# Altium PCB BIO26_pishield.PcbDoc (part 1 of 2)
Units mm, origin at the board's own origin, x right, y up, seen from the top; angles counter-clockwise.
Board outline 69 x 56 mm, 4 copper layers (Top Layer, Int1 (GND), Int2 (PWR), Bottom Layer), stack 1.369 mm thick; 29 components, 69 nets, 266 pads, 109 vias.
Unrouted connection lines stored in the file: 49.
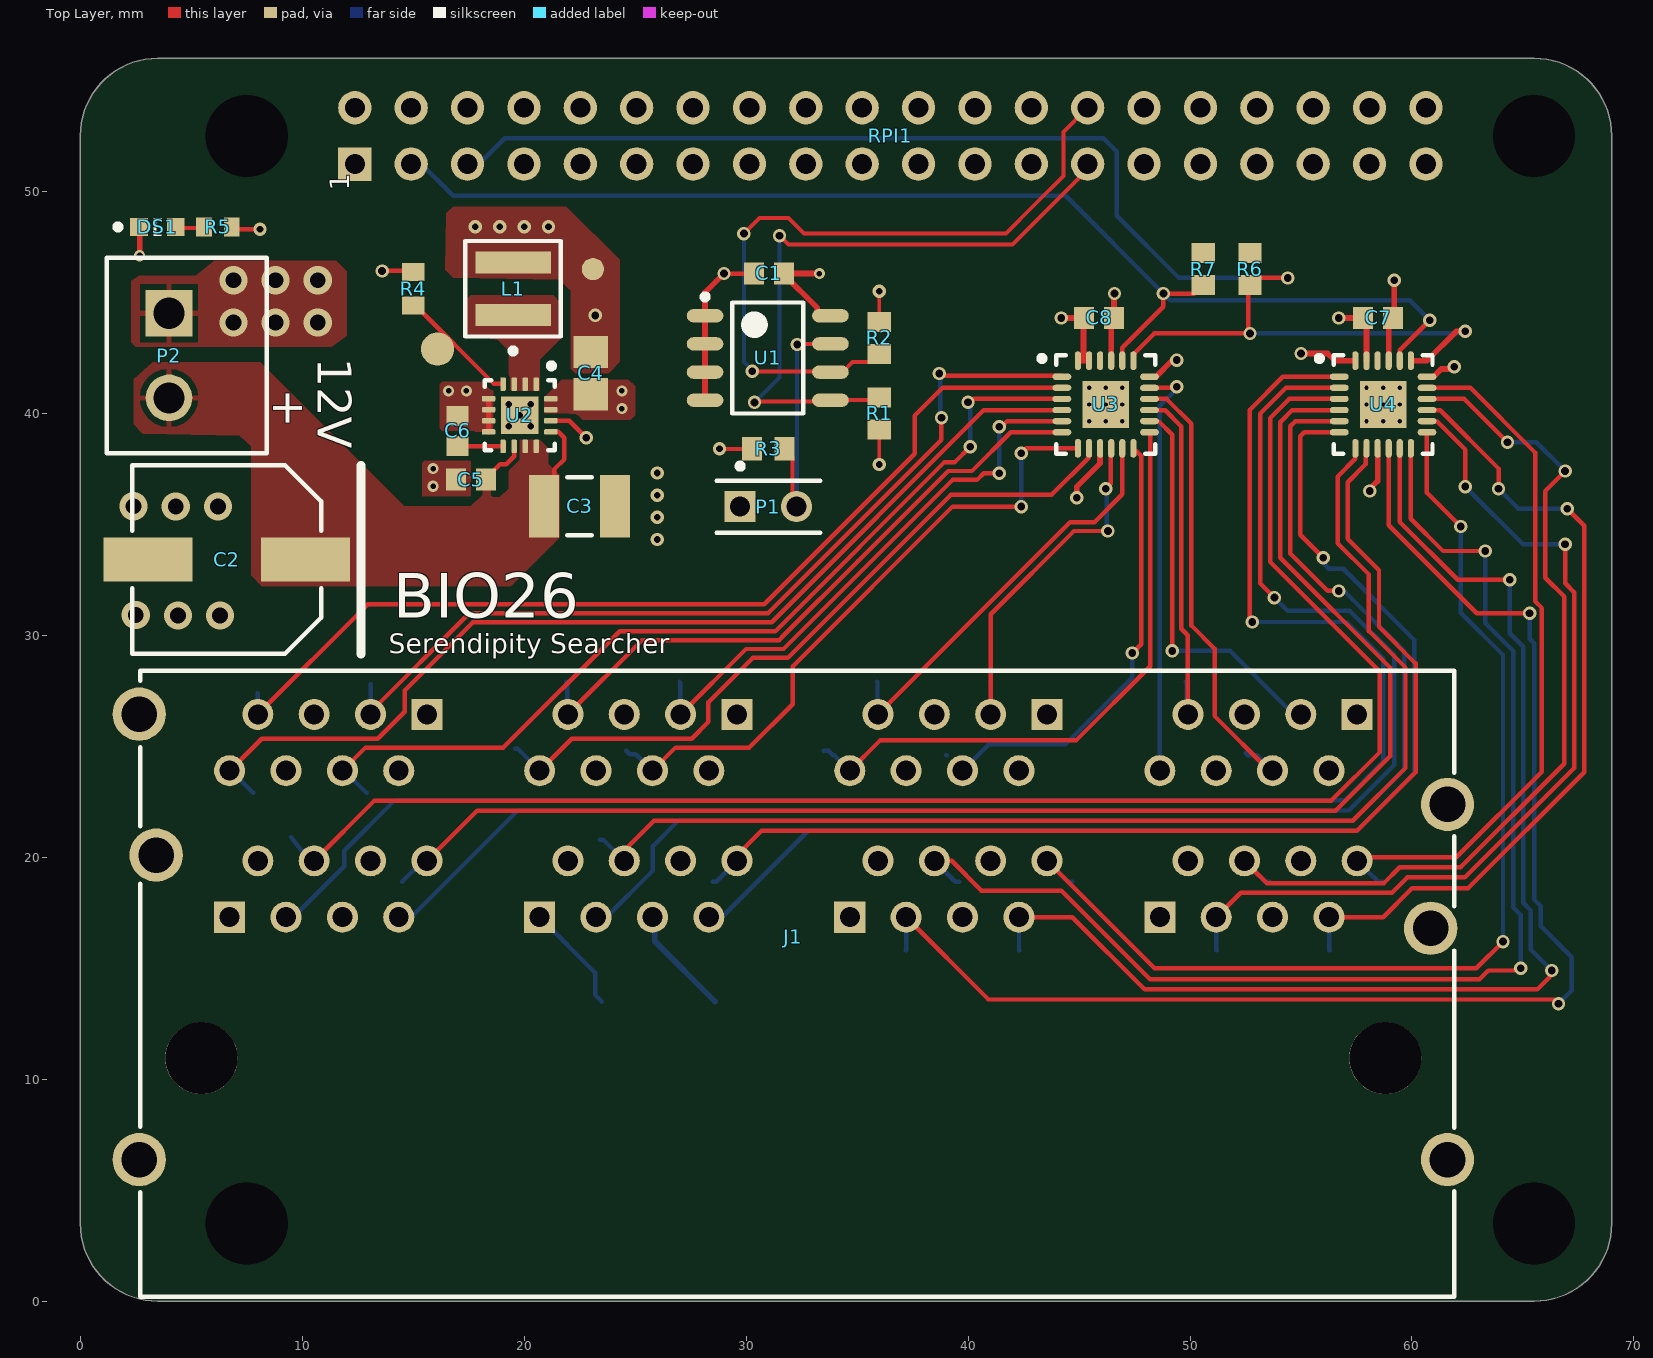
[diagram p0: Top Layer view]
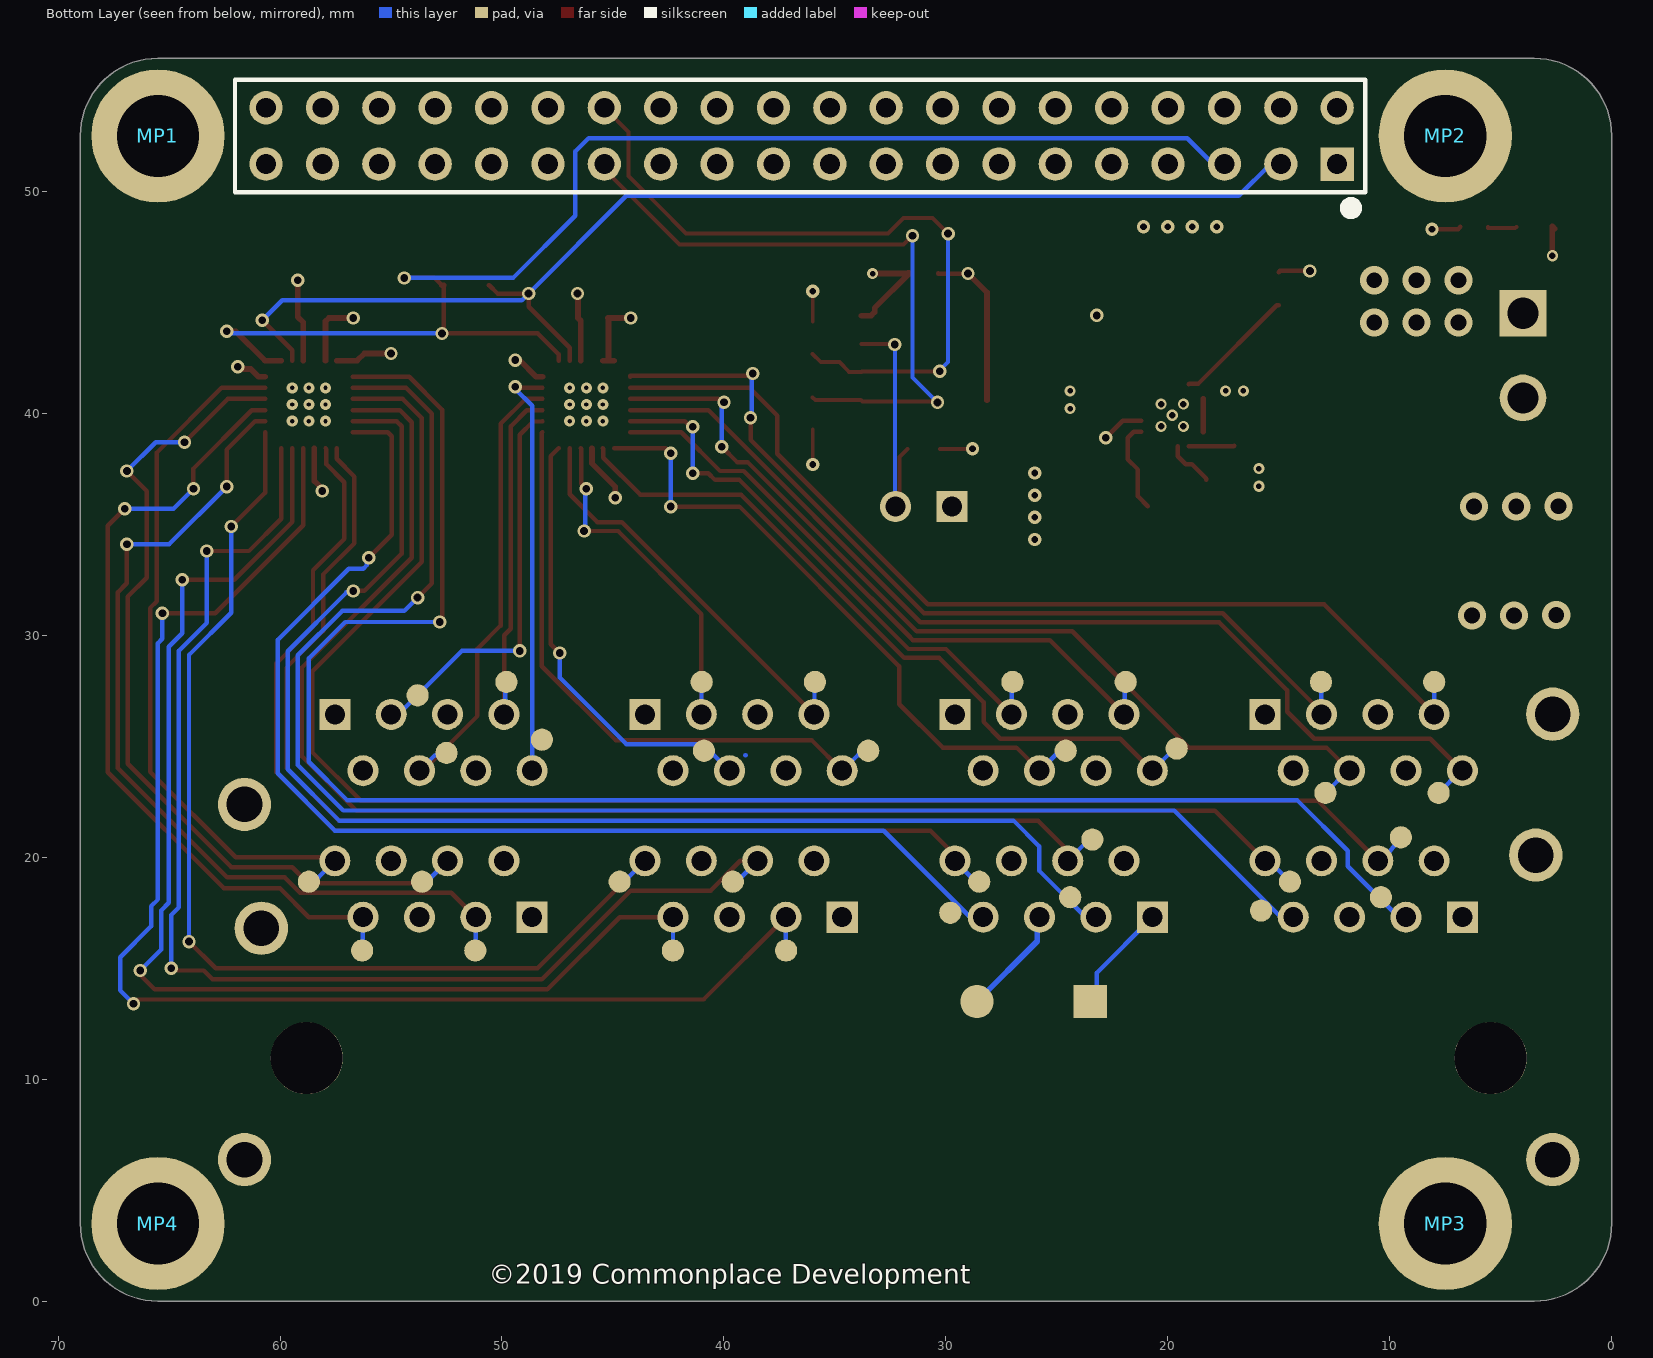
[diagram p1: Bottom Layer view, seen from below]
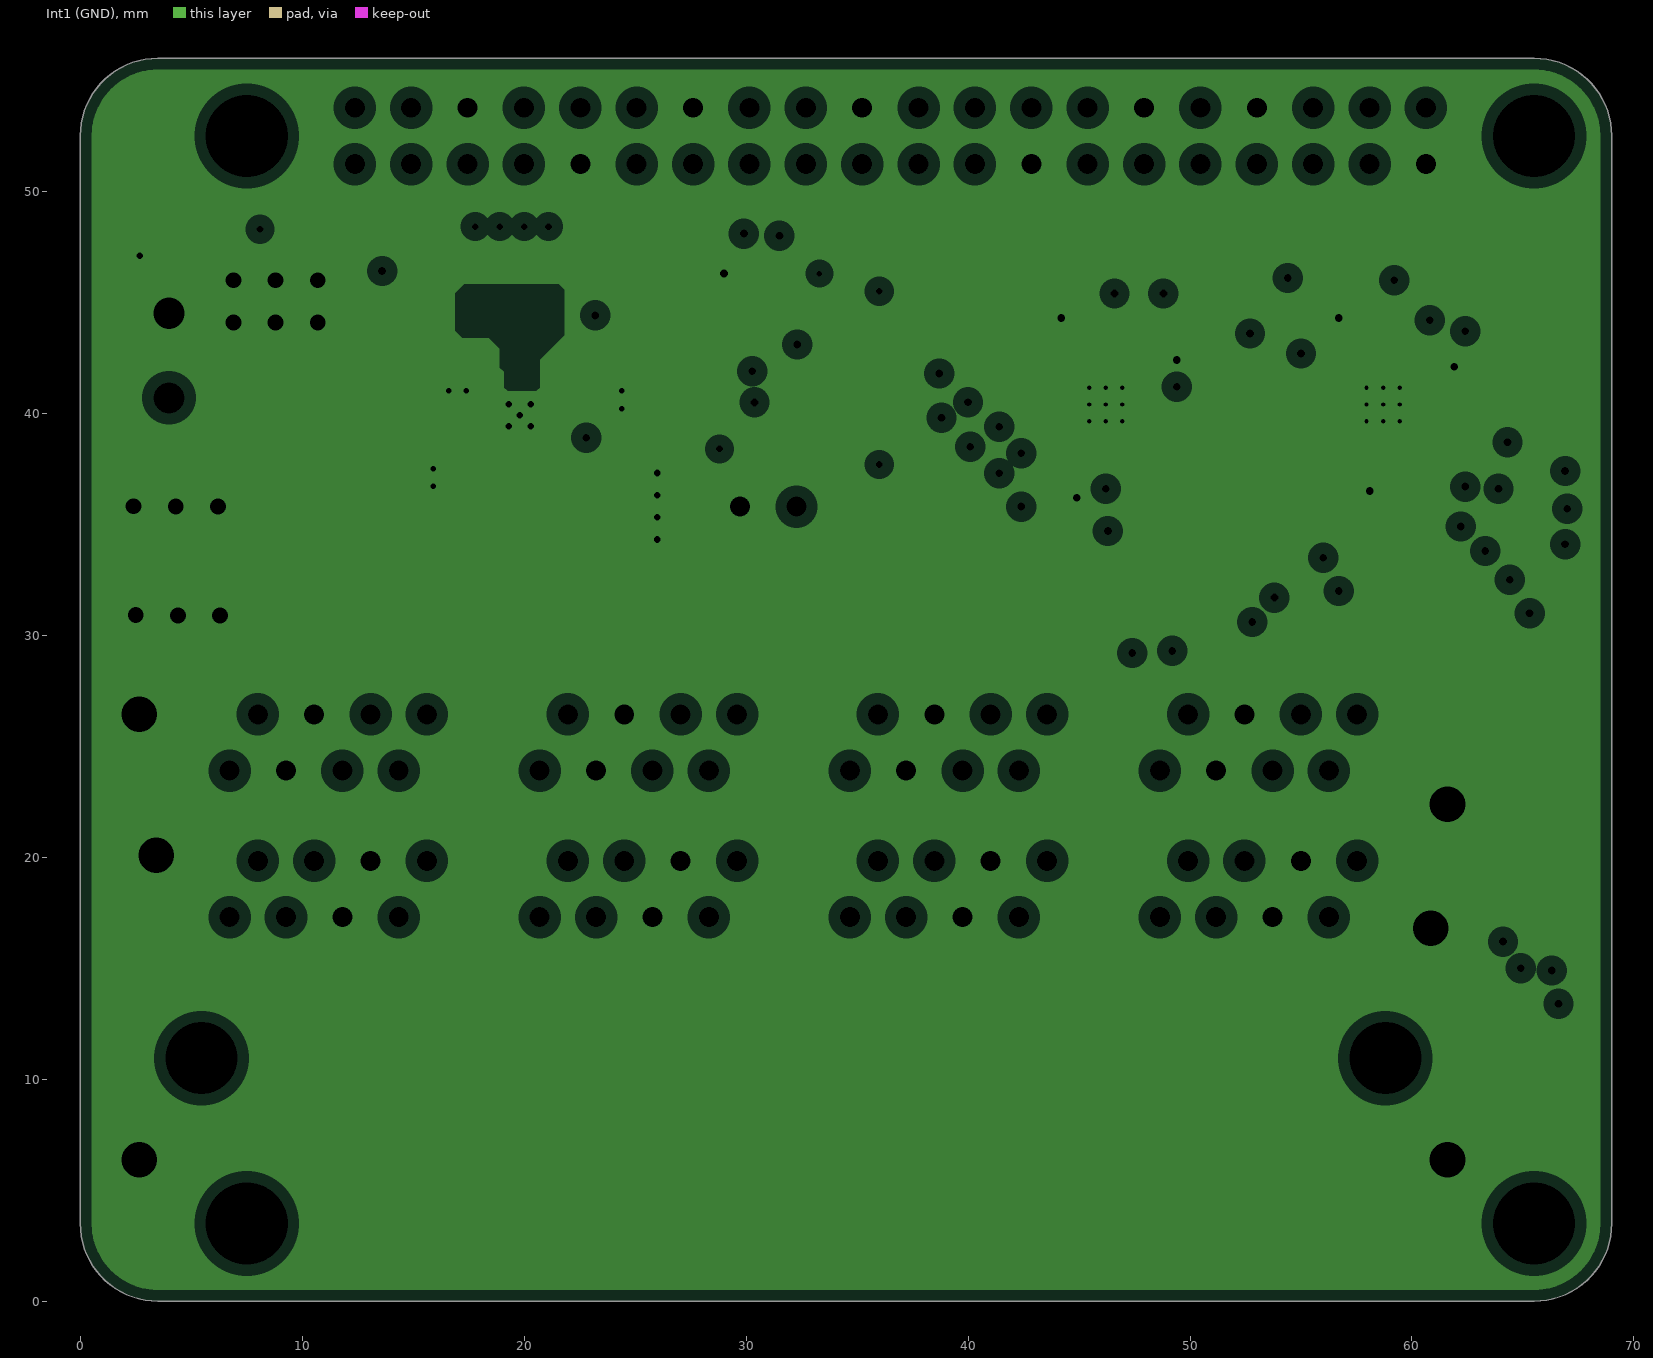
[diagram p2: Int1 (GND), clearances drawn from the general rule]
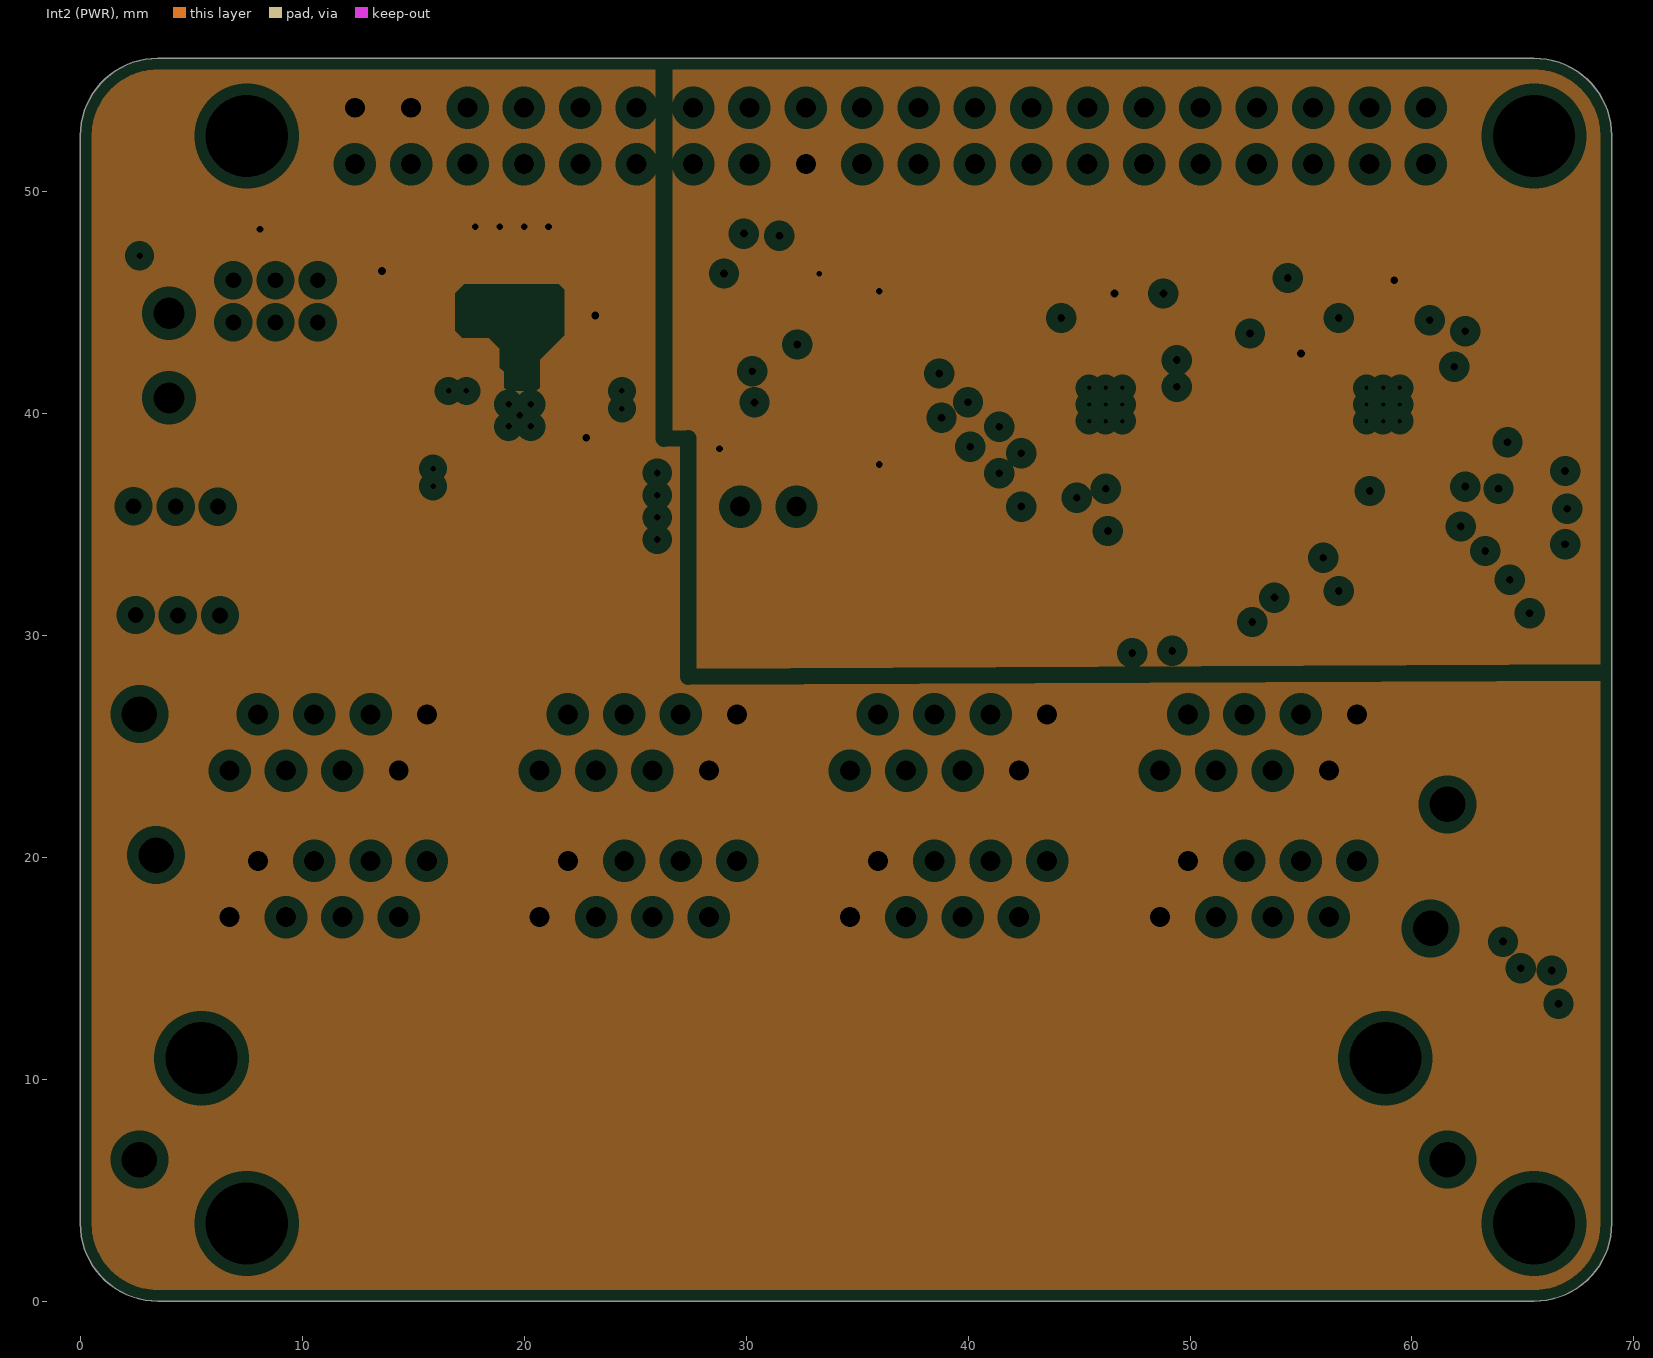
[diagram p3: Int2 (PWR), clearances drawn from the general rule]

## Layer stack, top to bottom
Top Solder: solder mask 0.0254, SM-001, Dk 4
Top Layer: signal copper 0.035
Dielectric 1: prepreg 0.1295, PP-017, Dk 4.3
Dielectric 2: prepreg 0.1295, PP-017, Dk 4.3
Int1 (GND): plane copper 0.035, net GND
Dielectric 3: core 0.7112, Core-039, Dk 4.8
Int2 (PWR): plane copper 0.035, net (Multiple Nets)
Dielectric 4: prepreg 0.1295, PP-017, Dk 4.3
Dielectric 5: prepreg 0.1295, PP-017, Dk 4.3
Bottom Layer: signal copper 0.035
Bottom Solder: solder mask 0.0254, SM-001, Dk 4

## Board outline
3.5,0 65.5,0 ccw(c65.5,3.5) 69,3.5 69,52.5 ccw(c65.5,52.5) 65.5,56 3.5,56 ccw(c3.5,52.5) 0,52.5 0,3.5 ccw(c3.5,3.5)

## Design rules (kind name [scope] priority, off if disabled: settings)
BoardOutlineClearance [All] p1: gap=0.2 ignorepadtopadclearanceinfootprint=FALSE except(0.4: Arc-SplitBarrior Arc-SplitContinuation Track-SplitBarrior Track-SplitContinuation SMDPad-SplitBarrior SMDPad-SplitContinuation THPad-SplitBarrior THPad-SplitContinuation Via-SplitBarrior Via-SplitContinuation Fill-SplitBarrior Fill-SplitContinuation Poly-SplitBarrior Poly-SplitContinuation Region-SplitBarrior Region-SplitContinuation Text-SplitBarrior Text-SplitContinuation)
Clearance Clearance_IO [InNetClass('GPIO[1..16]') or InNetClass('HALL[1..16]')] p1: gap=0.2 ignorepadtopadclearanceinfootprint=FALSE except(0.089: SMDPad-SMDPad; 0.127: Arc-Via Track-Via SMDPad-Via THPad-Via Via-Via; 0.254: Arc-Text Track-Text SMDPad-Text THPad-Text Via-Text Fill-Text Poly-Text Region-Text Text-Text)
Clearance [All] p2: gap=0.2 ignorepadtopadclearanceinfootprint=FALSE except(0.089: Arc-Arc Arc-Track Arc-SMDPad Track-Track Track-SMDPad SMDPad-SMDPad; 0.127: Arc-Via Track-Via SMDPad-Via THPad-Via Via-Via; 0.254: Arc-Text Track-Text SMDPad-Text THPad-Text Via-Text Fill-Text Poly-Text Region-Text Text-Text)
Clearance "Clearance Bottom Layer" [OnLayer('Bottom Layer')] p3: gap=0.203 ignorepadtopadclearanceinfootprint=TRUE except(0.254: Arc-Text Track-Text SMDPad-Text THPad-Text Via-Text Fill-Text Poly-Text Region-Text Text-Text)
Clearance "Clearance Top Layer" [OnLayer('Top Layer')] p4: gap=0.203 ignorepadtopadclearanceinfootprint=TRUE except(0.254: Arc-Text Track-Text SMDPad-Text THPad-Text Via-Text Fill-Text Poly-Text Region-Text Text-Text)
DiffPairsRouting RS485 [InDifferentialPair('RS485')] p1: maxlimit=0.127 minlimit=0.127 mostfreqgap=0.127 substack1={38668E16-BA02-485C-B457-04E51ADFF381} toplayer_minwidth=0.157 toplayer_maxwidth=0.157 toplayer_prefwidth=0.157 bottomlayer_minwidth=0.157 bottomlayer_maxwidth=0.157 bottomlayer_prefwidth=0.157 impedanceprofiledriven=TRUE impedanceprofileid={2957A7B5-88C2-4469-BF19-BCCFE4860604} impedanceprofilevalue=100.000000 maxuncoupledlength=12.7
DiffPairsRouting [All] p2: maxlimit=0.254 minlimit=0.254 mostfreqgap=0.254 toplayer_minwidth=0.381 toplayer_maxwidth=0.381 toplayer_prefwidth=0.381 bottomlayer_minwidth=0.381 bottomlayer_maxwidth=0.381 bottomlayer_prefwidth=0.381 maxuncoupledlength=12.7
Height [All] p1: minheight=0 maxheight=100 prefheight=12.7
HoleSize [All] p1: absolutevalues=TRUE maxlimit=6.3 minlimit=0.2 maxpercent=80.000 minpercent=20.000
MinimumAnnularRing [All] p1: minimumring=0.076
MinimumSolderMaskSliver [All] p1: minsoldermaskwidth=0.1
PlaneClearance [All] p1: clearance=0.508
PlaneConnect [All] p1: pad.planeconnectstyle=Relief pad.reliefexpansion=0.508 pad.reliefentries=4 pad.reliefconductorwidth=0.254 pad.reliefairgap=0.254 via.planeconnectstyle=Direct via.reliefexpansion=0.508 via.reliefentries=4 via.reliefconductorwidth=0.254 via.reliefairgap=0.254
PolygonConnect PolygonConnect_GND [InNet('GND') vs InNet('GND')] p1: thpad.connectstyle=Relief thpad.reliefconductorwidth=0.254 thpad.reliefentries=4 thpad.polygonreliefangle="90 Angle" thpad.airgapwidth=0.254 smdpad.connectstyle=Direct smdpad.reliefconductorwidth=0.254 smdpad.reliefentries=4 smdpad.polygonreliefangle="90 Angle" smdpad.airgapwidth=0.254 via.connectstyle=Direct via.reliefconductorwidth=0.254 via.reliefentries=4 via.polygonreliefangle="90 Angle" via.airgapwidth=0.254
PolygonConnect PolygonConnect_VIN [InNet('VIN') vs InNet('VIN')] p2: thpad.connectstyle=Relief thpad.reliefconductorwidth=0.254 thpad.reliefentries=4 thpad.polygonreliefangle="90 Angle" thpad.airgapwidth=0.254 smdpad.connectstyle=Direct smdpad.reliefconductorwidth=0.254 smdpad.reliefentries=4 smdpad.polygonreliefangle="90 Angle" smdpad.airgapwidth=0.254 via.connectstyle=Direct via.reliefconductorwidth=0.254 via.reliefentries=4 via.polygonreliefangle="90 Angle" via.airgapwidth=0.254
PolygonConnect PolygonConnect_SW [InNet('SW') vs InNet('SW')] p3: thpad.connectstyle=Relief thpad.reliefconductorwidth=0.254 thpad.reliefentries=4 thpad.polygonreliefangle="90 Angle" thpad.airgapwidth=0.254 smdpad.connectstyle=Direct smdpad.reliefconductorwidth=0.254 smdpad.reliefentries=4 smdpad.polygonreliefangle="90 Angle" smdpad.airgapwidth=0.254 via.connectstyle=Direct via.reliefconductorwidth=0.254 via.reliefentries=4 via.polygonreliefangle="90 Angle" via.airgapwidth=0.254
PolygonConnect PolygonConnect_5V [InNet('+5') vs InNet('+5')] p4: thpad.connectstyle=Relief thpad.reliefconductorwidth=0.254 thpad.reliefentries=4 thpad.polygonreliefangle="90 Angle" thpad.airgapwidth=0.254 smdpad.connectstyle=Direct smdpad.reliefconductorwidth=0.254 smdpad.reliefentries=4 smdpad.polygonreliefangle="90 Angle" smdpad.airgapwidth=0.254 via.connectstyle=Direct via.reliefconductorwidth=0.254 via.reliefentries=4 via.polygonreliefangle="90 Angle" via.airgapwidth=0.254
PolygonConnect PolygonConnect_VSWITCH [InNet('VSWITCH') vs InNet('VSWITCH')] p5: thpad.connectstyle=Relief thpad.reliefconductorwidth=0.254 thpad.reliefentries=4 thpad.polygonreliefangle="90 Angle" thpad.airgapwidth=0.254 smdpad.connectstyle=Direct smdpad.reliefconductorwidth=0.254 smdpad.reliefentries=4 smdpad.polygonreliefangle="90 Angle" smdpad.airgapwidth=0.254 via.connectstyle=Direct via.reliefconductorwidth=0.254 via.reliefentries=4 via.polygonreliefangle="90 Angle" via.airgapwidth=0.254
PolygonConnect [All] p6: thpad.connectstyle=Relief thpad.reliefconductorwidth=0.508 thpad.reliefentries=4 thpad.polygonreliefangle="90 Angle" thpad.airgapwidth=0.254 smdpad.connectstyle=Relief smdpad.reliefconductorwidth=0.508 smdpad.reliefentries=4 smdpad.polygonreliefangle="90 Angle" smdpad.airgapwidth=0.254 via.connectstyle=Direct via.reliefconductorwidth=0.508 via.reliefentries=4 via.polygonreliefangle="90 Angle" via.airgapwidth=0.254
RoomDefinition U_IO_Connector [InComponentClass('U_IO_Connector')] p1: confinementstyle=ConfineIn formatcopy=TRUE lockcomponents=FALSE outline 0.981,-0.279 0.981,28.879 63.279,28.879 63.279,-0.279
RoomDefinition U_IO [InComponentClass('U_IO')] p2: confinementstyle=ConfineIn formatcopy=TRUE lockcomponents=FALSE outline -3.1,-1.6 112.025,-1.6 112.025,57.6 -3.1,57.6
RoomDefinition U_SMPS [InComponentClass('U_SMPS')] p3: confinementstyle=ConfineIn formatcopy=TRUE lockcomponents=FALSE outline 0.521,28.636 0.521,38.194 0.721,38.194 0.721,47.489 1.196,47.489 1.196,49.179 4.821,49.179 7.579,49.179 7.579,48.144 22.029,48.144 22.029,44.244 24.579,44.244 24.579,37.994 25.579,37.994 25.579,33.636 13.104,33.636 13.104,28.636
RoomDefinition "U_RPI Hat ID" [InComponentClass('U_RPI Hat ID')] p4: confinementstyle=ConfineIn formatcopy=TRUE lockcomponents=FALSE outline 26.546,39.216 26.546,45.774 29.396,45.774 29.396,47.334 32.654,47.334 32.654,45.774 35.404,45.774 35.404,45.379 37.329,45.379 37.329,38.021 33.714,38.021 33.714,34.251 28.269,34.251 28.269,39.216
RoomDefinition "U_RPI 3" [InComponentClass('U_RPI 3')] p5: confinementstyle=ConfineIn formatcopy=TRUE lockcomponents=FALSE outline 0.981,-0.279 0.981,28.879 4.021,28.879 4.021,55.979 68.979,55.979 68.979,0.021 63.279,0.021 63.279,-0.279
RoutingCorners [All] p1: cornerstyle=Round minsetback=2.54 maxsetback=2.54
RoutingVias RoutingVias_IO [InNetClass('GPIO[1..16]') or InNetClass('HALL[1..16]')] p1: holewidth=0.35 width=0.6 viastyle="Through Hole" minholewidth=0.35 minwidth=0.6 maxholewidth=1 maxwidth=2
RoutingVias [All] p2: holewidth=0.35 width=0.6 viastyle="Through Hole" minholewidth=0.2 minwidth=0.45 maxholewidth=1 maxwidth=2
SilkToSilkClearance [All] p1: silktosilkclearance=0.1
SilkToSolderMaskClearance [IsPad] p1: minsilkscreentomaskgap=0.1 clearancetoexposedcopper=TRUE
SolderMaskExpansion [All] p1: expansion=0.102
Width Width_IO [InNetClass('GPIO[1..16]') or InNetClass('HALL[1..16]')] p1: maxlimit=0.2 minlimit=0.089 preferedwidth=0.2
Width [All] p2: maxlimit=2.54 minlimit=0.089 preferedwidth=0.381
21 further rules are at their usual default settings.

## Classes and differential pairs
net class HALL[1..16]: HALL1 HALL2 HALL3 HALL4 HALL5 HALL6 HALL7 HALL8 HALL9 HALL10 HALL11 HALL12 HALL13 HALL14 HALL15 HALL16
net class GPIO[1..16]: GPIO1 GPIO2 GPIO3 GPIO4 GPIO5 GPIO6 GPIO7 GPIO8 GPIO9 GPIO10 GPIO11 GPIO12 GPIO13 GPIO14 GPIO15 GPIO16
component class U_IO: C7 C8 R6 R7 U3 U4
component class U_IO_Connector: J1
component class U_SMPS: C2 C3 C4 C5 C6 DS1 L1 P2 R4 R5 U2
component class "U_RPI Hat ID": C1 P1 prog R1 R2 R3 U1
component class "U_RPI 3": MP1 MP2 MP3 MP4 RPI1

## Components (designator, comment, footprint, x,y, rotation, side; value= is the part's Value field where it differs from the comment)
C1 "0.1uF" CAPC1608X87X35NL15T15 31.025,46.305 r180 top
C2 "470uF" PNSC-FK-V-F_V 6.6,33.415 r180 top
C3 "10uF" CAPC1210(3225)210_M 22.5,35.815 r180 top
C4 "22uF" CAPC2013X95X45ML15T25 23,41.815 r90 top
C5 "0.1uF" CAPC1608X87X35NL15T15 17.6,37.015 r180 top
C6 "3.3nF" CAPC1608X87X35NL15T15 17,39.215 r270 top
C7 "0.1uF" CAPC1608X87X35NL15T15 58.475,44.3 r180 top
C8 "0.1uF" CAPC1608X87X35NL15T15 45.9,44.3 r180 top
DS1 "APG1608SURKC/T" KING-LED0603-25-RED_V 3.475,48.4 r180 top
J1 "615064243321" 615064243321 32.13,14.3 r0 top locked
L1 "XFL4020-222MEC" COIL-IND-2_V 19.5,45.615 r90 top
MP1 "M2.5x10mm" 9774100151 65.5,52.5 r180 bottom locked
MP2 "M2.5x10mm" 9774100151 7.5,52.5 r180 bottom locked
MP3 "M2.5x10mm" 9774100151 7.5,3.5 r180 bottom locked
MP4 "M2.5x10mm" 9774100151 65.5,3.5 r180 bottom locked
P1 "5-146280-2" TECO-5-146280-2_V 31,35.8 r0 top
P2 "691321300002" 691321300002 4.8,42.605 r270 top
R1 "3.9K" RESC1608X55X30ML15T15 36,40 r270 top
R2 "3.9K" RESC1608X55X30ML15T15 36,43.4 r90 top
R3 "1K" RESC1608X55X30ML15T15 31,38.4 r180 top
R4 "100k" RESC1608X55X25ML10T15 15,45.615 r90 top
R5 "1K" RESC1608X55X30LL15T15 6.2,48.4 r0 top
R6 "3.9K" RESC1608X55X30ML15T15 52.7,46.5 r90 top
R7 "3.9K" RESC1608X55X30ML15T15 50.6,46.5 r90 top
RPI1 "RPI GPIO Connector" RPI 36.5,52.5 r180 top locked
U1 "M24C02-WMN6TP" STM-M24C02-WMN6TP-8_M 30.975,42.495 r0 top locked
U2 "TPS62143RGTT" RGT0016C_V 19.8,39.915 r270 top
U3 "PCA9555RGERG4" RGE24-2100X2100TP 46.2,40.4 r0 top
U4 "PCA9555RGERG4" RGE24-2100X2100TP 58.7,40.4 r0 top

## Footprints (in the part's own frame and the unit in brackets; to place one, negate y for a bottom-side part, rotate by r counter-clockwise, add the part's x,y. Pads: shape width x height; smd on the part's side, far side on the other; paste and mask are expansions set on the pad)
9774100151 [mm] "SMT Steel Spacer with internal Thread M2.5, height 10mm"
  round 6 / inner round 0 / far side round 0 hole 3.7 unplated: 1(0,0)
  body extent -2.55,-2.55 2.55,2.55, height 10
615064243321 [mm] "Modular Jack Horizontal Shielded 2x4 Stacked with EMI Panel Finger 8P8C Tab Up&Down"
  rect 1.4x1.4 hole 0.9: A1(-16.51,12.14) B1(-2.54,12.14) C1(11.43,12.14) D1(25.4,12.14) E1(-25.4,3) F1(-11.43,3) G1(2.54,3) H1(16.51,3)
  round 1.4 hole 0.9: A2(-17.78,9.6) A3(-19.05,12.14) A4(-20.32,9.6) A5(-21.59,12.14) A6(-22.86,9.6) A7(-24.13,12.14) A8(-25.4,9.6) B2(-3.81,9.6) B3(-5.08,12.14) B4(-6.35,9.6) B5(-7.62,12.14) B6(-8.89,9.6) B7(-10.16,12.14) B8(-11.43,9.6) C2(10.16,9.6) C3(8.89,12.14) C4(7.62,9.6) C5(6.35,12.14) C6(5.08,9.6) C7(3.81,12.14) C8(2.54,9.6) D2(24.13,9.6) D3(22.86,12.14) D4(21.59,9.6) D5(20.32,12.14) D6(19.05,9.6) D7(17.78,12.14) D8(16.51,9.6) E2(-24.13,5.54) E3(-22.86,3) E4(-21.59,5.54) E5(-20.32,3) E6(-19.05,5.54) E7(-17.78,3) E8(-16.51,5.54) F2(-10.16,5.54) F3(-8.89,3) F4(-7.62,5.54) F5(-6.35,3) F6(-5.08,5.54) F7(-3.81,3) F8(-2.54,5.54) G2(3.81,5.54) G3(5.08,3) G4(6.35,5.54) G5(7.62,3) G6(8.89,5.54) G7(10.16,3) G8(11.43,5.54) H2(17.78,5.54) H3(19.05,3) H4(20.32,5.54) H5(21.59,3) H6(22.86,5.54) H7(24.13,3) H8(25.4,5.54)
  round 3.25 hole 3.25 unplated: MH1(-26.67,-3.35) MH2(26.67,-3.35)
  round 2.4 hole 1.6: S1(-29.47,-7.92) S2(-28.71,5.8) S3(-29.47,12.15) S4(29.47,8.08) S5(28.71,2.5) S6(29.47,-7.92)
  silkscreen extent -29.42,-14.1 29.78,14.1, body extent -30.22,-14.1 30.58,14.1, height 26.85
691321300002 [mm] "Vertical PCB Header, pitch 3.81mm, 02p"
  rect 2.1x2.1 hole 1.4: 1(-1.905,-0.8)
  round 2.1 hole 1.4: 2(1.905,-0.8)
  silkscreen extent -4.4,-3.6 4.41,3.6, body extent -4.4,-3.6 4.41,3.6, height 9.25
CAPC1210(3225)210_M [mm] "Chip Capacitor, Body 3.2x2.5mm, Height 2.1mm, IPC Low Density"
  rect 1.35x2.8 smd: 1(-1.6,0) 2(1.6,0)
  silkscreen extent -0.55,-1.3 0.55,1.3, body extent -1.7,-1.35 1.7,1.35, height 2.1
CAPC1608X87X35NL15T15 [mm] "Chip Capacitor, 2-Leads, Body 1.60x0.80mm, IPC Medium Density"
  rect 0.9x1 smd: 1(-0.675,0) 2(0.675,0)
  body extent -0.87,-0.48 0.87,0.47, height 0.87
CAPC2013X95X45ML15T25 [mm] "Chip Capacitor, 2-Leads, Body 2.00x1.25mm, IPC Low Density"
  rect 1.45x1.55 smd: 1(-0.95,0) 2(0.95,0)
  body extent -1.08,-0.7 1.07,0.7, height 0.95
COIL-IND-2_V [mm] "Inductor, 2-Leads, Body 4.3x4.3mm, Pitch 2.37mm"
  rect 0.98x3.4 smd paste+0: 1(-1.185,0) 2(1.185,0)
  silkscreen extent -2.92,-2.15 2.15,2.15, body extent -2.15,-2.15 2.15,2.15, height 2.1
KING-LED0603-25-RED_V [mm] "LED, SMT, Body 1.6x0.8mm, 0.28mm Thickness, Red"
  rect 0.8x0.8 smd paste+0: 1(-0.825,0) 2(0.825,0)
  silkscreen extent -0.2,-0.4 1.9,0.4, body extent -0.8,-0.4 0.8,0.4, height 0.28
PNSC-FK-V-F_V [mm] "CAPAE, 2-Leads, Body 8.50x8.50mm"
  rect 4x2 smd: 1(-3.55,0) 2(3.55,0)
  silkscreen extent -6.05,-4.25 4.25,4.25, body extent -5,-4.25 5,4.25, height 10.5
RESC1608X55X25ML10T15 [mm] "Chip Resistor, 2-Leads, Body 1.60x0.80mm, IPC Low Density"
  rect 0.8x1 smd: 1(-0.75,0) 2(0.75,0)
  body extent -0.85,-0.45 0.85,0.45, height 0.55
RESC1608X55X30LL15T15 [mm] "Chip Resistor, 2-Leads, Body 1.60x0.80mm, IPC High Density"
  rect 0.7x0.85 smd: 1(-0.625,0) 2(0.625,0)
  body extent -0.87,-0.48 0.87,0.48, height 0.55
RESC1608X55X30ML15T15 [mm] "Chip Resistor, 2-Leads, Body 1.60x0.80mm, IPC Low Density"
  rect 0.9x1.05 smd: 1(-0.725,0) 2(0.725,0)
  body extent -0.87,-0.48 0.87,0.48, height 0.55
RGE24-2100X2100TP [mm] "QFN, 24-Leads, Body 4x4mm, Pitch 0.5mm, Thermal Pad 2.1x2.1mm, TI Recommended"
  oval 0.85x0.28 smd paste-0.025 mask+0.07: 1(-1.975,1.25) 2(-1.975,0.75) 3(-1.975,0.25) 4(-1.975,-0.25) 5(-1.975,-0.75) 6(-1.975,-1.25) 13(1.975,-1.25) 14(1.975,-0.75) 15(1.975,-0.25) 16(1.975,0.25) 17(1.975,0.75) 18(1.975,1.25)
  oval 0.28x0.85 smd paste-0.025 mask+0.07: 7(-1.25,-1.975) 8(-0.75,-1.975) 9(-0.25,-1.975) 10(0.25,-1.975) 11(0.75,-1.975) 12(1.25,-1.975) 19(1.25,1.975) 20(0.75,1.975) 21(0.25,1.975) 22(-0.25,1.975) 23(-0.75,1.975) 24(-1.25,1.975)
  rect 2.1x2.1 smd paste-1.05 mask+0.07: 25(0,0)
  silkscreen extent -3,-2.23 2.23,2.23, body extent -2.07,-2.07 2.07,2.07, height 1
RGT0016C_V [mm] "QFN, 16-Leads, Body 3x3mm, Pitch 0.5mm, Thermal Pad 1.65x1.65mm"
  rrect40% 0.6x0.25 smd: 1(-1.4,0.75) 2(-1.4,0.25) 3(-1.4,-0.25) 4(-1.4,-0.75) 9(1.4,-0.75) 10(1.4,-0.25) 11(1.4,0.25) 12(1.4,0.75)
  rrect40% 0.25x0.6 smd: 5(-0.75,-1.4) 6(-0.25,-1.4) 7(0.25,-1.4) 8(0.75,-1.4) 13(0.75,1.4) 14(0.25,1.4) 15(-0.25,1.4) 16(-0.75,1.4)
  rrect6% 1.55x1.55 on Top Paste: 17(0,0)
  rrect6% 1.7x1.7 smd paste-0.85: 17(0,0)
  silkscreen extent -2.35,-1.57 1.57,1.58, body extent -1.5,-1.5 1.5,1.5, height 1
RPI [mm]
  rect 1.5x1.5 hole 0.9: 1(24.13,1.27)
  round 1.5 hole 0.9: 2(24.13,-1.27) 3(21.59,1.27) 4(21.59,-1.27) 5(19.05,1.27) 6(19.05,-1.27) 7(16.51,1.27) 8(16.51,-1.27) 9(13.97,1.27) 10(13.97,-1.27) 11(11.43,1.27) 12(11.43,-1.27) 13(8.89,1.27) 14(8.89,-1.27) 15(6.35,1.27) 16(6.35,-1.27) 17(3.81,1.27) 18(3.81,-1.27) 19(1.27,1.27) 20(1.27,-1.27) 21(-1.27,1.27) 22(-1.27,-1.27) 23(-3.81,1.27) 24(-3.81,-1.27) 25(-6.35,1.27) 26(-6.35,-1.27) 27(-8.89,1.27) 28(-8.89,-1.27) 29(-11.43,1.27) 30(-11.43,-1.27) 31(-13.97,1.27) 32(-13.97,-1.27) 33(-16.51,1.27) 34(-16.51,-1.27) 35(-19.05,1.27) 36(-19.05,-1.27) 37(-21.59,1.27) 38(-21.59,-1.27) 39(-24.13,1.27) 40(-24.13,-1.27)
  body extent -25.52,-2.63 25.53,2.38, height 8.5
STM-M24C02-WMN6TP-8_M [mm] "SOIC, 8-Leads, Body 5x4mm, Pitch 1.27mm, IPC Low Density"
  oval 1.65x0.6 smd: 1(-2.825,1.905) 2(-2.825,0.635) 3(-2.825,-0.635) 4(-2.825,-1.905) 5(2.825,-1.905) 6(2.825,-0.635) 7(2.825,0.635) 8(2.825,1.905)
  silkscreen extent -2.95,-2.5 1.6,2.88, body extent -2,-2.5 2,2.5, height 1.75
TECO-5-146280-2_V [mm] "Connector, 2-Leads, Body 4.67x2.34mm, Pitch 2.54mm"
  rect 1.4x1.4 hole 0.89: 1(-1.27,0)
  round 1.4 hole 0.89: 2(1.27,0)
  silkscreen extent -2.33,-1.17 2.34,1.94, body extent -2.34,-1.17 2.34,1.17, height 5.33

## Part data
C1 C5 C7 C8: library part CMP-2006-03300-1, Manufacturer=Kemet, Part Number=C0603X104K5RACTU
C2: library part CMP-2000-06204-1, "Aluminum Electrolytic Capacitor, 470 uF, +/- 20%, 16 V, 2-Pin SMD (Size Code F), -55 to 105 degC, RoHS, Tape and Reel", Capacitance=470µF, Case Size/Dimension=Ø8x10.2mm, Lifetime@Temperature=2000Hrs@105°C, Manufacturer=Panasonic, Operating Temp-Max=105°C, Operating Temp Range=-55to+105°C, Package Description="2-Pin Electrolytic Aluminum Capacitor, Body 8.3 x 8.3 mm", Package Reference=FK-V-F, Rated Voltage=16V, Ripple Current=600mA, Datasheet URL=http://industrial.panasonic.com/cdbs/www-data/pdf/RDE0000/ABA0000C1181.pdf, Datasheet Version=03/2016, Impedance=0.16O, Manufacturer URL=http://www.panasonic.com/, Mounting Technology=SurfaceMount, Package URL=http://industrial.panasonic.com/cdbs/www-data/pdf/RDE0000/DME0000COL48.pdf, Series=FK, Type=Can
C3: library part CMP-1038-02235-1, "CAP 10uF 35V ±20% 1210 (3225 Metric) Thickness 2.1mm SMD", Case-EIA=1210, Case-Metric=3225, Rated Voltage="35 V", Tolerance=±20%, Max Thickness="2.1 mm", Technology=SMT
C4: library part CMP-2007-00096-1, Manufacturer=Murata, Part Number=GRM219R61A226MEA0D
C6: library part CMP-2006-03881-1, Manufacturer=Kemet, Part Number=C0603C332K5RAC7867
DS1: library part CMP-0404-00004-1, "Ultra Thin Hyper Red SMD Chip LED Lamp, 2 to 2.5 V, -40 to 85 degC, Body 1.6 x 0.8 mm, 0.28 mm Thickness, RoHS, Tape and Reel", Forward Voltage="2 to 2.5 V", Manufacturer=Kingbright, Operating Temperature="-40 to 85 degC", ComponentLink1Description="Manufacturer URL", ComponentLink1URL=http://www.kingbrightusa.com/, ComponentLink2Description=Datasheet, ComponentLink2URL=http://www.kingbrightusa.com/images/catalog/SPEC/APG1608SURKC-T.pdf, ComponentLink3Description="Package Specification", ComponentLink3URL=http://www.kingbrightusa.com/images/catalog/SPEC/APG1608SURKC-T.pdf, DatasheetVersion="Rev. V.5A", Dice="Hyper Red (AlGaInP)", IR (Max)="10 uA", Lens Type="Water Clear", Luminous Intensity mcd @ 20 mA (Min.)=55, Luminous Intensity mcd @ 20 mA (Typ.)=110, Mounting Technology="Surface Mount", PackageDescription="2-Pin SMT, Body 1.6 x 0.8 mm, 0.28mm Thickness, Red", PackageReference=LED0603-25-RED, PackageVersion="Rev. V.5A", Packing="Tape and Reel", PartNumber=APG1608SURKC/T, RoHS=TRUE, Viewing Angle=120
J1: library part CMP-1502-01714-1, "Modular Jack WR-MJ, Tab Up & Down, Shielded, 2 x 4 Stacked with EMI Panel Finger, Horizontal Entry, THT, 8P8C", Contact Resistance=20mOhm, Manufacturer="Wurth Elektronik", Operating Temperature=-40to85degC, Rated Current=1.5A, Withstanding Voltage=1000VAC, Working Voltage=120VAC, Compliance=Leadfree/RoHS, Datasheet URL=https://katalog.we-online.de/em/datasheet/615064243321.pdf, Entrance=Horizontal, Manufacturer URL=http://www.we-online.de, Mounting Technology=THT, Package Reference=615064243321, Packaging=Tray, Part Number=615064243321, Pin Number=8P8C, Port=2x4, Publisher=WurthElektronik
L1: library part CMP-2000-05090-2, "High Temperature Shielded Power Inductor, 2.2 uH, +/- 20 %, -40 to 125 degC, 2-Pin SMD, RoHS, Tape and Reel", Case Height=2.1mm, Case Length=4.3mm, Inductance=2.2uH, Manufacturer=Coilcraft, Maximum DC Current=8A, Maximum DC Resistance=23.5mOhms, Operating Temperature Range=-40Cto+125C, Self Resonant Frequency=38MHz, Test Frequency=100kHz, Tolerance=20%, Case Width=4.3mm, Core Material=Composite, Datasheet URL=http://www.mouser.com/ds/2/597/xfl4020-270756.pdf, Datasheet Version=Jul-12, Dimensions=4.3mmWx4.3mmLx2.1mmH, Manufacturer URL=http://www.coilcraft.com/, Packaging=Reel, PartNumber=XFL4020-222MEC, Product=PowerInductors, RoHS=Details, Series=XFL4020, Shielding=Shielded, Termination Style=SMD/SMT
MP1 MP2 MP3 MP4: library part 9774100151, "WA-SMSI SMT Steel Spacer, OD5.1mm, M2.5x10mm", Operating Temperature="-55 to +150degC", ComponentLink1Description=Manufacturer, ComponentLink1URL=http://www.we-online.de, ComponentLink2Description=Datasheet, ComponentLink2URL=https://katalog.we-online.com/em/datasheet/9774100151.pdf, Inner Diameter=3.5mm, Inner Thread Length=-, Length=10mm, Material=Steel, Mounting Technology=SMT, Outer Diameter=5.1mm, Packaging=Bulk, Part Number=9774100151, Published Date="September 2019", Publisher="Wurth Elektronik", Surface=Tin, Thread=M2.5
P1: library part CMP-2000-07492-1, "Male Header, Pitch 2.54 mm, 1 x 2 Position, Height 8.21 mm, Tail Length 3.05 mm, -65 to 105 degC, RoHS, Bulk", Case\/Package=100, Colour=Black, Current Rating=3A, Flammability Rating=UL94V-0, High Temperature Housing=Yes, Manufacturer="TE Connectivity", Max Current Rating=5A, Max Operating Temperature=105degC, Min Operating Temperature=-65degC, Package Description="Male Header, Pitch 2.54 mm, 1 x 2 Position, Height 8.21 mm, Tail Length 3.05 mm", Package Quantity=500, Approvals=CSA, Board Standoff=No(Without), Connector Type=Header, Contact Gender=Male, Contact Material=CopperAlloy, Contact Mating Length=0.23inch, Contact Plating=Matte, Contact Protection=No(Without), Contact Shape=Square, Datasheet URL=http://www.te.com/commerce/DocumentDelivery/DDEController?Action=showdoc&DocId=Customer+Drawing%7F146280%7FH1%7Fpdf%7FEnglish%7FENG_CD_146280_H1.pdf%7F5-146280-2, Datasheet Version="Rev. H1, 08/2016", Depth=2.34mm, Gasket=No(Without), High Speed Serial Data Connector=No, Housing Colour=Black, Housing Material=Polymer, Keyed=No, Length=4.67mm, Manufacturer URL=http://www.te.com/, Mating Alignment=No(Without), Mating Connector Lock=No(Without), Mating Post Length=0.23inch, Mount=ThroughHole, Mounting Technology=ThroughHole, Number of Contacts=2, Number of Positions=2, Number of Rows=1, Orientation=Straight, Package Reference=5-146280-2, Packaging=Carton, Panel Mount Retention=No(Without), PCB Mounting Orientation=Vertical, PCB Mount Retention=Without, PCB Thickness=0.063inch, Pitch=2.54mm, Radiation Hardening=No, RoHSCompliant=true, Row Spacing=2.54mm, Selectively Loaded=No(Without), Stabilizers=No(Without), Termination=ThroughHole, Termination Post Length=0.12inch
P2: library part CMP-1502-01863-1, "Serie 321 - 3.81mm Vertical PCB Header WR-TBL, 2 pin", Manufacturer="Wurth Elektronik", Operating Temperature=-40to105degC, Datasheet URL=http://katalog.we-online.de/em/datasheet/6913213000xx.pdf, Gender=Male, Manufacturer URL=http://www.we-online.de, Mounting Technology=THT, Package Reference=691321300002, Packaging=Box, Part Number=691321300002, Pin Number=2, Pitch=3.81mm, Publisher=WurthElektronik
R1 R2 R3 R5 R6 R7: library part CMP-2000-00180-1, Manufacturer=Panasonic, Part Number=ERJ-3EKF1001V
R4: library part CMP-2100-03662-1, "Chip Resistor, 100 KOhm, +/- 1%, 0.1 W, -55 to 155 degC, 0603 (1608 Metric), RoHS, Tape and Reel", Case/Package=0603, Case Code (Metric)=1608, Manufacturer=Yageo, Max Operating Temperature=155degC, Min Operating Temperature=-55degC, Package Description="2-Pin Surface Mount Device, Body 1.6 x 0.8 mm", Power Rating=100mW, Resistance=100KOhm, Temperature Coefficient=100ppm/degreesC, Tolerance=1%, Voltage Rating=50V, Case Code (Imperial)=0603, Composition=ThickFilm, Datasheet URL=http://www.yageo.com/NewPortal/yageodocoutput?fileName=/pdf/R-Chip/PYu-RC_Group_51_RoHS_L_5.pdf, Datasheet Version="Rev. 5, 10/2016", Depth=0.8mm, Height=0.45mm, Lead Free=LeadFree, Length=1.6mm, Manufacturer URL=http://www.yageo.com/, Military Standard=Not, Number of Pins=2, Package Reference=0603, Packaging=TapeandReel, REACH SVHC=NoSVHC, RoHSCompliant=true, Termination=SMD/SMT, Voltage Rating (DC)=50V, Width=0.8mm
RPI1: library part "rpi connector", "GPIO Header for Raspberry Pi A+/B+/Pi 2/Pi 3 - 2x20", Manufacturer="SparkFun Electronics", Manufacturer Part Number=PRT-14017, Supplier Part Number 1=1568-1462-ND, Accessory Type=Connector, Category="Development Boards, Kits, Programmers", ComponentLink1Description=https://cdn.sparkfun.com/datasheets/Dev/RaspberryPi/12313.pdf, ComponentLink1URL=https://cdn.sparkfun.com/datasheets/Dev/RaspberryPi/12313.pdf, For Use With/Related Products="Raspberry Pi", Nils Minor=author, nilsminor@web.de=mail, Part Status=Active, Pricing 1="1=1.84 (EUR)", RoHS="RoHS Compliant", Stock 1=150, Supplier 1=Digi-Key
U1: library part CMP-2000-05370-1, "EEPROM Serial-I2C, 2Kbit, 2.5 to 5.5 V, 400 kHz, 8-Pin SO, -40 to 85 degC, RoHS, Tape and Reel", Frequency=0.4MHz, Manufacturer=STMicroelectronics, Operating Supply Voltage (Max)=5.5V, Operating Supply Voltage (Min)=2.5V, Operating Supply Voltage (Typ)=3.3/5V, Operating Temperature (Max)=85C, Operating Temperature (Min)=-40C, Operating Temperature Classification=Industrial, Operating Temp Range=-40Cto85C, Package Type=SOICN, Supply Current=2mA, Access Time (Max)=900ns, Data Retention=40, Datasheet URL=https://datasheet.ciiva.com/26870/m24c02-wmn6tp-26870257.pdf, Datasheet Version="Rev. 17, 04/2011", DELETED=Compliant, Density=2048Bit, Frequency (Max)=0.4MHz, Interface Type=Serial(I2C), Manufacturer URL=http://www.st.com/, Mounting=SurfaceMount, Organization=256x8, Packaging=TapeandReel, Pin Count=8, Programmable=Yes, Rad Hardened=No, Write Protection=Yes
U2: library part CMP-0323-00125-3, "Buck Step Down Regulator with 3 to 17 V Input and 5 V Output, -40 to 85 degC, 16-Pin QFN (RGT), Green (RoHS & no Sb/Br)", Manufacturer="Texas Instruments", Rating=Catalog, Switch Current Limit(Typ)(A)=3, Code_JEDEC=MO-220, ComponentLink1Description=Datasheet, ComponentLink1URL=http://www.ti.com/general/docs/lit/getliterature.tsp?genericPartNumber=TPS62143&fileType=pdf, ComponentLink2Description="Package Specification", ComponentLink2URL=http://www.ti.com/litv/pdf/mpqf119g, ComponentLink3Description="URL Link1", ComponentLink3URL="Samples URL:http://www.ti.com/product/tps54611#samples", DatasheetVersion=SLVSAJ0, Duty Cycle(Max)(%)=100, Eco-Plan="Green (RoHS & no Sb/Br)", Iout(Max)(A)=2, Iq(Typ)(mA)=0.017, Mounting Technology="Surface Mount", PackageDescription="16-Pin Plastic Quad Flat No-Lead, 3 x 3 mm Body, 0.5 mm Pitch, 1.7 x 1.7 mm Exposed Pad", PackageReference=RGT0016C, PackageVersion="revH, Oct-2011", PartNumber=TPS62143RGTT, Preset Vout(V)=5, Regulated Outputs(#)=1, SubFamily="Step-Down Regulator", Synchronous Rectification=TRUE, Topology=Buck, Vin(Max)(V)=17, Vin(Min)(V)=3, Vout(Max)(V)=5, Vout(Min)(V)=5
U3 U4: library part CMP-0314-00040-1, "Remote 16-Bit I2C and SMBus I/O Expander with Interrupt Output and Configuration Registers, 2.3 to 5.5 V, -40 to 85 degC, 24-pin VQFN (RGE), Green (RoHS & no Sb/Br)", 5V Tolerant I/O=Yes, Manufacturer="Texas Instruments", Max Frequency(kHz)=400, # of I/Os=16, Code_JEDEC=MO-220, ComponentLink1Description=Datasheet, ComponentLink1URL=http://www.ti.com/general/docs/lit/getliterature.tsp?genericPartNumber=PCA9555&fileType=pdf, ComponentLink2Description="Package Specification", ComponentLink2URL=http://www.ti.com/litv/pdf/mpds211a, Configuration Registers=Yes, DatasheetVersion=SCPS131E, Eco-Plan="Green (RoHS & no Sb/Br)", fSCLK(Max)(MHz)=400, I2C Address="0100 xxx", Interrupt Output=Yes, Mounting Technology="Surface Mount", No. of Outputs=2, PackageDescription="24-Pin Plastic Quad Flatpack No-Lead, 4 x 4 mm Body, 0.5 mm Pitch", PackageReference=RGE24-2100X2100TP, PackageVersion="revG, Jul-2011", PartNumber=PCA9555RGERG4, Push-Pull I/O Type=Yes, SubFamily="I2C IO Expander", VCC(Max)(V)=5.5, VCC(Min)(V)=2.3, Vcc range(V)="2.3 to 5.5"

## Free pads (board coordinates)
  round 1 smd far side: 2(7.8,22.9) 2(8,27.9) 2(9.5,20.9) 2(10.4,18.2) 2(12.9,22.9) 2(13.1,27.9) 2(14.5,18.9) 2(15.8,17.6) 2(19.6,24.9) 2(21.9,27.9) 2(23.4,20.8) 2(24.4,18.2) 2(24.6,24.8) 2(27,27.9) 2(28.5,18.9) 2(29.8,17.5) 2(33.5,24.8) 2(35.9,27.9) 2(37.2,15.8) 2(39.6,18.9) 2(40.9,24.8) 2(41,27.9) 2(42.3,15.8) 2(44.7,18.9) 2(48.2,25.3) 2(49.8,27.9) 2(51.2,15.8) 2(52.5,24.7) 2(53.6,18.9) 2(53.8,27.3) 2(56.3,15.8) 2(58.7,18.9)
  round 1.5 smd: 2(16.1,42.9)
  rect 1.5x1.5 smd far side: 2(23.5,13.5)
  round 1.5 smd far side: 2(28.6,13.5)
  round 1 smd: 3(23.1,46.5)

## Via types
v1: diameter 0.6, hole 0.35, Top Layer to Bottom Layer, 54 vias
v2: diameter 0.5, hole 0.2, Top Layer to Bottom Layer, 18 vias
v3: diameter 0.6, hole 0.3, Top Layer to Bottom Layer, 12 vias
v4: diameter 1.27, hole 0.711, Top Layer to Bottom Layer, 12 vias
v5: diameter 0.5, hole 0.25, Top Layer to Bottom Layer, 7 vias
v6: diameter 0.5, hole 0.3, Top Layer to Bottom Layer, 6 vias

## Nets (pads, with @x,y where several pads share a name; then routed paths per layer and width w, separated by ;. In a path a pad name is that pad's centre, name@x,y a point inside that pad or via, vN(x,y) a via of type N, cw(c..) or ccw(c..) an arc to the next point about the centre after c; other vN are vias at no path point)
+3V3: C1.1 C7.1 C8.1 R1.2 R2.2 R3.2 R6.2 R7.2 RPI1.1 RPI1.17 U1.8 U3.21 U4.21 U4.24 | length 18.6
  Top Layer w0.17: v3(28.8,38.4) R3.2 ; R2.2@35.995,44.13 R2.2 v3(36,45.5) ; v3(36,37.7) R1.2
  Top Layer w0.254: C1.1@31.635,46.305 31.65,46.305 33.209,44.746 33.209,44.56 33.369,44.4 U1.8 ; C1.1 31.705,46.3 v5(33.3,46.3) ; U3.21 46.45,44.175 C8.1 46.575,45.375 v1(46.6,45.4) ; v1(55,42.7) 56.2,42.7 56.525,42.375 U4.24 ; U4.21 58.95,44.1 59.2,44.35 v1(59.2,46)
  Top Layer w0.305: C1.1@31.635,46.305 C1.1
+5: C4.2 J1.A1 J1.A2 J1.B1 J1.B2 J1.C1 J1.C2 J1.D1 J1.D2 J1.E1 J1.E2 J1.F1 J1.F2 J1.G1 J1.G2 J1.H1 J1.H2 L1.2 pad.2@23.5,13.5 pad.3 R4.2 R5.2 RPI1.2 RPI1.4 U2.14 | length 9.6
  Top Layer w0.203: R5.2 6.925,48.3 v3(8.1,48.3) ; v1(13.6,46.415) 14.95,46.415 R4.2 ; U2.14 22.035,39.665 v1(22.8,38.9)
  Bottom Layer w0.203: J1.F1 23.195,14.805 23.195,13.805 pad.2@23.5,13.5
  other v1: 23.2,44.415
  other v3: 17.8,48.415 18.9,48.415 20,48.415 21.1,48.415
GND: C1.2 C2.2 C3.1 C4.1 C5.2 C6.1 C7.2 C8.2 DS1.2 J1.A5 J1.A6 J1.B5 J1.B6 J1.C5 J1.C6 J1.D5 J1.D6 J1.E5 J1.E6 J1.F5 J1.F6 J1.G5 J1.G6 J1.H5 J1.H6 J1.S1 J1.S2 J1.S3 J1.S4 J1.S5 J1.S6 P1.1 P2.1 pad.2@28.6,13.5 RPI1.6 RPI1.9 RPI1.14 RPI1.20 RPI1.25 RPI1.30 RPI1.34 RPI1.39 U1.1 U1.2 U1.3 U1.4 U2.5 U2.6 U2.7 U2.8 U2.15 U2.16 U2.17@19.8,39.915 U3.9 U3.18 U3.23 U3.24 U3.25 U4.9 U4.18 U4.23 U4.25 | length 29.6
  Top Layer w0.203: v1(29,46.3) 30.345,46.3 C1.2
  Top Layer w0.254: DS1.2@2.575,48.325 DS1.2 2.675,48.425 v6(2.675,47.1) ; U2.8 U2.7 U2.6 U2.5 ; U1.4 U1.3 U1.2 U1.1 28.15,45.45 v1(29,46.3) ; v1(44.2,44.3) C8.2 45.2,44.275 45.2,42.375 ; v1(44.9,36.2) 44.9,36.7 45.945,37.745 45.945,38.42 U3.9 ; U3.24 45.2,42.375 ; U3.23 45.2,42.375 ; U3.18 48.46,41.65 49.21,42.4 v1(49.4,42.4) ; v1(56.7,44.3) C7.2 57.95,44.15 U4.23 ; v1(58.1,36.5) 58.1,36.6 58.45,36.95 U4.9 ; U4.18 60.967,41.65 61.317,42 61.8,42 v1(61.9,42.1)
  Bottom Layer w0.254: J1.F5 25.881,17.199 25.881,16.219 pad.2@28.6,13.5
  other v2: 45.45,39.65 46.2,39.65 46.95,39.65 57.95,39.65 58.7,39.65 59.45,39.65 45.45,40.4 46.2,40.4 46.95,40.4 57.95,40.4 58.7,40.4 59.45,40.4 45.45,41.15 46.2,41.15 46.95,41.15 57.95,41.15 58.7,41.15 59.45,41.15
  other v3: 26,34.315 26,35.315 26,36.315 26,37.315
  other v4: 4.4,30.9 6.3,30.9 2.5,30.915 4.3,35.8 6.2,35.8 2.4,35.815 6.9,44.1 8.8,44.1 10.7,44.1 6.9,46 8.8,46 10.7,46
  other v5: 15.9,36.715 15.9,37.515 24.4,40.215 16.6,41.015 17.4,41.015 24.4,41.015
  other v6: 19.3,39.415 20.3,39.415 19.8,39.915 19.3,40.415 20.3,40.415
GPIO1: J1.A7 pad.2@8,27.9 U3.2 | length 44.3
  Top Layer w0.2: J1.A7 12.96,31.4 30.819,31.4 37.6,38.181 37.6,39.9 38.85,41.15 U3.2
  Bottom Layer w0.2: J1.A7 pad.2@8,27.4
GPIO2: J1.A8 pad.2@7.8,22.9 U3.4 | length 46.3
  Top Layer w0.2: J1.A8 8.175,25.345 13.402,25.345 14.618,26.562 14.618,27.518 17.694,30.594 31.153,30.594 40.71,40.15 U3.4
  Bottom Layer w0.2: J1.A8 6.8,23.9 pad.2@7.8,22.9
GPIO3: J1.B7 pad.2@21.9,27.9 U3.6 | length 29
  Top Layer w0.2: J1.B7 25.317,29.787 31.487,29.787 31.7,30 35.06,33.36 39.103,37.403 40.173,37.403 41.92,39.15 U3.6
  Bottom Layer w0.2: pad.2@21.9,27.9 21.935,27.865 21.935,26.475 J1.B7
GPIO4: J1.B8 pad.2@19.6,24.9 U3.8 | length 33
  Top Layer w0.2: J1.B8 22.145,25.345 27.545,25.345 28.3,26.1 28.3,26.977 30.304,28.981 31.881,28.981 32.487,29.587 35.866,32.966 39.229,36.329 43.763,36.329 45.435,38.001 45.435,38.41 U3.8
  Bottom Layer w0.2: pad.2@19.6,24.9 19.7,24.9 J1.B8
GPIO5: J1.C7 pad.2@35.9,27.9 U3.11 | length 18.7
  Top Layer w0.2: J1.C7 44.603,35.103 45.703,35.103 46.95,36.35 U3.11
  Bottom Layer w0.2: pad.2@35.9,27.9 35.92,27.88 35.92,26.46 J1.C7
GPIO6: J1.C8 pad.2@33.5,24.8 U3.13 | length 27.6
  Top Layer w0.2: J1.C8 36.034,25.265 44.865,25.265 48.203,28.603 48.203,39.122 U3.13
  Bottom Layer w0.2: pad.2@33.5,24.8 33.716,24.8 33.909,24.607 33.963,24.607 J1.C8
GPIO7: J1.D7 pad.2@49.8,27.9 U3.15 | length 16.9
  Top Layer w0.2: U3.15 48.19,40.135 48.887,40.135 49.597,39.425 49.597,39.208 49.603,39.201 49.603,30.297 49.9,30 49.9,26.85 49.5,26.85 J1.D7
  Bottom Layer w0.2: pad.2@49.8,27.9 49.855,27.845 49.855,26.495 J1.D7
GPIO8: J1.D8 pad.2@48.2,25.3 U3.17 | length 18.9
  Top Layer w0.2: U3.17 49.35,41.15 v1(49.4,41.2)
  Bottom Layer w0.2: J1.D8 48.64,40.34 49.4,41.1 v1(49.4,41.2)
GPIO9: J1.E7 pad.2@15.8,17.6 U4.2 | length 71.7
  Top Layer w0.2: v1(53.8,31.7) 53.154,32.346 53.154,39.98 54.324,41.15 U4.2
  Bottom Layer w0.2: J1.E7@14.325,17.275 J1.E7 14.9,17.3 19.708,22.108 57.15,22.108 59.2,24.158 59.2,29.1 57.2,31.1 54.4,31.1 v1(53.8,31.7)
GPIO10: J1.E8 pad.2@14.5,18.9 U4.4 | length 66.8
  Top Layer w0.2: J1.E8 17.88,22.1 56.554,22.1 59.011,24.557 59.011,28.547 54.062,33.496 54.062,39.604 54.608,40.15 U4.4
  Bottom Layer w0.2: pad.2@14.5,18.9 15.44,19.84 J1.E8
GPIO11: J1.F7 pad.2@29.8,17.5 U4.6 | length 54
  Top Layer w0.2: v1(56,33.5) 54.97,34.53 54.97,38.97 55.15,39.15 U4.6
  Bottom Layer w0.2: J1.F7@28.31,17.29 J1.F7 28.9,17.3 32.8,21.2 57.526,21.2 60.108,23.782 60.108,29.792 56.9,33 56.249,33 56.1,33.149 56.1,33.306 56,33.406 v1(56,33.5)
GPIO12: J1.F8 pad.2@28.5,18.9 U4.8 | length 50.1
  Top Layer w0.2: J1.F8 29.59,20.09 30.692,21.192 57.518,21.192 60.162,23.836 60.162,28.734 58.514,30.382 58.514,32.928 57.1,34.342 57.1,36.9 57.917,37.717 57.917,38.392 U4.8
  Bottom Layer w0.2: pad.2@28.5,18.9 28.65,18.9 J1.F8
GPIO13: J1.G7 pad.2@42.3,15.8 U4.11 | length 55.1
  Top Layer w0.2: J1.G7 44.7,17.3 47.954,14.046 65.646,14.046 66.3,14.7 v1(66.3,14.9) ; U4.11 59.45,35.108 62.058,32.5 v1(64.4,32.5)
  Bottom Layer w0.2: J1.G7 42.295,17.295 42.295,15.805 pad.2@42.3,15.8 ; v1(64.4,32.5) 64.4,30.1 65.008,29.492 65.008,17.95 65.354,17.604 65.354,15.846 v1(66.3,14.9)
GPIO14: J1.G8 pad.2@44.7,18.9 U4.13 | length 48.9
  Top Layer w0.2: J1.G8 48.4,15 62.9,15 v1(64.1,16.2) ; U4.13 60.675,36.425 v1(62.2,34.9)
  Bottom Layer w0.2: J1.G8 44.5,18.9 pad.2@44.7,18.9 ; v1(62.2,34.9) 62.2,31.016 64.1,29.116 v1(64.1,16.2)
GPIO15: J1.H7 pad.2@56.3,15.8 U4.15 | length 36.6
  Top Layer w0.2: J1.H7 58.7,17.3 60,18.6 62.526,18.6 67.762,23.836 67.762,34.938 v1(67,35.7) ; U4.15 60.68,40.145 61.267,40.145 63.9,37.513 v1(63.9,36.6)
  Bottom Layer w0.2: J1.H7 56.28,17.28 56.28,15.82 pad.2@56.3,15.8 ; v1(63.9,36.6) 64.8,35.7 v1(67,35.7)
GPIO16: J1.H8 pad.2@58.7,18.9 U4.17 | length 32.1
  Top Layer w0.2: J1.H8 57.69,20 62,20 65.854,23.854 65.854,31.229 65.546,31.537 65.546,38.237 62.633,41.15 U4.17
  Bottom Layer w0.2: J1.H8 58.237,19.133 58.251,19.133 58.484,18.9 pad.2@58.7,18.9
HALL1: J1.A3 pad.2@13.1,27.9 U3.1 | length 40.9
  Top Layer w0.2: J1.A3 13.08,26.55 17.527,30.997 30.986,30.997 38.8,38.811 v1(38.8,39.8) ; v1(38.7,41.8) 38.8,41.7 44.225,41.7 U3.1
  Bottom Layer w0.2: J1.A3 13.09,26.45 13.09,27.79 pad.2@13.1,27.8 ; v1(38.7,41.8) 38.75,41.75 38.75,39.85 v1(38.8,39.8)
HALL2: J1.A4 pad.2@12.9,22.9 U3.3 | length 42.2
  Top Layer w0.2: J1.A4 12.852,24.942 19.056,24.942 24.304,30.19 31.32,30.19 38.936,37.806 39.406,37.806 v1(40.1,38.5) ; v1(40,40.5) 40.107,40.5 40.257,40.65 U3.3
  Bottom Layer w0.2: J1.A4 11.9,23.9 pad.2@12.9,22.9 ; v1(40,40.5) 40.1,40.4 v1(40.1,38.5)
HALL3: J1.B3 pad.2@27,27.9 U3.5 | length 25.4
  Top Layer w0.2: J1.B3 29.994,29.384 31.684,29.384 35.063,32.763 39.3,37 40.4,37 40.7,37.3 v1(41.4,37.3) ; v1(41.4,39.4) 41.507,39.4 41.757,39.65 U3.5
  Bottom Layer w0.2: pad.2@27,27.9 27.025,27.875 27.025,26.465 J1.B3 ; v1(41.4,37.3) v1(41.4,39.4)
HALL4: J1.B4 pad.2@24.6,24.8 U3.7 | length 29.1
  Top Layer w0.2: J1.B4 26.822,24.942 30.142,24.942 32.1,26.9 32.1,28.6 39.3,35.8 v1(42.4,35.8) ; v1(42.4,38.2) 42.625,38.425 U3.7
  Bottom Layer w0.2: pad.2@24.6,24.8 24.753,24.647 25.033,24.647 J1.B4 ; v1(42.4,35.8) v1(42.4,38.2)
HALL5: J1.C3 pad.2@41,27.9 U3.10 | length 16.7
  Top Layer w0.2: J1.C3 41.02,30.95 44.77,34.7 v1(46.3,34.7) ; v1(46.2,36.6) 46.435,36.835 46.435,38.41 U3.10
  Bottom Layer w0.2: pad.2@41,27.9 41.01,27.89 41.01,26.45 J1.C3 ; v1(46.2,36.6) 46.25,36.55 46.25,34.75 v1(46.3,34.7)
HALL6: J1.C4 pad.2@40.9,24.8 U3.12 | length 20.1
  Top Layer w0.2: v1(47.4,29.2) 47.8,29.6 47.8,38.075 U3.12
  Bottom Layer w0.2: 39.009,24.607 39.043,24.607 ; J1.C4 40.95,25.1 44.4,25.1 47.4,28.1 v1(47.4,29.2)
HALL7: J1.D3 pad.2@53.8,27.3 U3.14 | length 18
  Top Layer w0.2: U3.14 48.19,39.635 48.599,39.635 49.2,39.034 v1(49.2,29.3)
  Bottom Layer w0.2: v1(49.2,29.3) 51.8,29.3 54.66,26.44 J1.D3
HALL8: J1.D4 pad.2@52.5,24.7 U3.16 | length 21.1
  Top Layer w0.2: U3.16 48.942,40.65 50.062,39.53 50.062,30.441 51.106,29.397 51.106,26.367 53.574,23.9 J1.D4
  Bottom Layer w0.2: pad.2@52.5,24.7 52.593,24.607 53.013,24.607 J1.D4
HALL9: J1.E3 pad.2@10.4,18.2 U4.1 | length 78.3
  Top Layer w0.2: v1(52.8,30.6) 52.8,30.694 52.7,30.794 52.7,40.168 54.182,41.65 U4.1
  Bottom Layer w0.2: J1.E3@9.235,17.265 J1.E3 9.6,17.3 11.9,19.6 11.9,20.3 14.162,22.562 56.962,22.562 58.7,24.3 58.7,28.958 57.058,30.6 v1(52.8,30.6)
HALL10: J1.E4 pad.2@9.5,20.9 U4.3 | length 72.2
  Top Layer w0.2: J1.E4 13.254,22.554 56.366,22.554 58.557,24.745 58.557,28.359 53.608,33.308 53.608,39.792 54.466,40.65 U4.3
  Bottom Layer w0.2: pad.2@9.5,20.9 10.34,19.84 J1.E4
HALL11: J1.F3 pad.2@24.4,18.2 U4.5 | length 60.2
  Top Layer w0.2: v1(56.7,32) 56.2,32 54.516,33.684 54.516,39.416 54.75,39.65 U4.5
  Bottom Layer w0.2: J1.F3@23.22,17.28 J1.F3 23.7,17.3 25.8,19.4 25.8,20.5 26.954,21.654 57.338,21.654 59.654,23.97 59.654,29.288 57.008,31.934 56.766,31.934 v1(56.7,32)
HALL12: J1.F4 pad.2@23.4,20.8 U4.7 | length 54.7
  Top Layer w0.2: J1.F4 24.51,20.31 25.846,21.646 57.33,21.646 59.708,24.024 59.708,28.546 58.06,30.194 58.06,32.74 56.646,34.154 56.646,37.146 57.45,37.95 U4.7
  Bottom Layer w0.2: pad.2@23.4,20.8 23.55,20.8 J1.F4
HALL13: J1.G3 pad.2@37.2,15.8 U4.10 | length 62.6
  Top Layer w0.2: J1.G3 40.918,13.592 66.408,13.592 v1(66.6,13.4) ; U4.10 58.95,34.966 62.916,31 v1(65.3,31)
  Bottom Layer w0.2: pad.2@37.2,15.8 37.205,15.805 37.205,17.295 J1.G3 ; v1(65.3,31) 65.3,29.842 65.5,29.642 65.5,18.1 65.808,17.792 65.808,16.888 67.2,15.496 67.2,14 v1(66.6,13.4)
HALL14: J1.G4 pad.2@39.6,18.9 U4.12 | length 56.9
  Top Layer w0.2: J1.G4 39.26,19.84 40.6,18.5 44.2,18.5 48.2,14.5 63.042,14.5 63.442,14.9 64.6,14.9 64.634,14.934 64.834,14.934 v1(64.9,15) ; U4.12 59.95,35.25 61.4,33.8 v1(63.3,33.8)
  Bottom Layer w0.2: J1.G4 39.42,18.9 pad.2@39.6,18.9 ; v1(63.3,33.8) 63.3,30.558 64.554,29.304 64.554,17.746 64.9,17.4 v1(64.9,15)
HALL15: J1.H3 pad.2@51.2,15.8 U4.14 | length 40.2
  Top Layer w0.2: J1.H3 52.28,18.4 59.1,18.4 59.792,19.092 62.376,19.092 67.308,24.024 67.308,31.934 66.9,32.342 v1(66.9,34.1) ; U4.14 60.68,39.645 61.125,39.645 62.4,38.37 v1(62.4,36.7)
  Bottom Layer w0.2: J1.H3 51.19,17.29 51.19,15.81 pad.2@51.2,15.8 ; v1(62.4,36.7) 65,34.1 v1(66.9,34.1)
HALL16: J1.H4 pad.2@53.6,18.9 U4.16 | length 40.3
  Top Layer w0.2: J1.H4 52.76,19.84 52.76,19.53 53.452,18.838 58.738,18.838 59.446,19.546 62.188,19.546 66.854,24.212 66.854,31.746 66,32.6 66,36.5 v1(66.9,37.4) ; U4.16 62.35,40.65 v1(64.3,38.7)
  Bottom Layer w0.2: J1.H4 53.39,18.9 pad.2@53.6,18.9 ; v1(64.3,38.7) 65.6,38.7 v1(66.9,37.4)
"I2C SCL": R6.1 RPI1.5 U3.19 U4.19 | length 65
  Top Layer w0.203: U3.19 47.45,42.66 48.39,43.6 v1(52.7,43.6) 52.625,43.675 R6.1@52.625,45.775 ; R6.1 53.025,46.1 v1(54.4,46.1)
  Top Layer w0.254: R6.1@52.625,45.775 R6.1 ; U4.19 60.675,42.375 62,43.7 v1(62.4,43.7)
  Bottom Layer w0.203: RPI1.5@17.564,50.836 19.128,52.4 46.1,52.4 46.7,51.8 46.7,48.9 49.5,46.1 v1(54.4,46.1) ; v1(52.7,43.6) 62.3,43.6 v1(62.4,43.7)
  Bottom Layer w0.254: RPI1.5 17.564,51.116 RPI1.5@17.564,50.836
"I2C SDA": R7.1 RPI1.3 U3.20 U4.20 | length 57
  Top Layer w0.203: U3.20 46.95,42.95 48.8,44.8 v1(48.8,45.4) 50.198,45.4 R7.1@50.573,45.775 ; U4.20 59.45,42.85 v1(60.8,44.2) ; R7.1@50.573,45.775 R7.1 R7.1@50.573,45.775
  Bottom Layer w0.203: RPI1.3 14.912,51.228 15.372,51.228 16.8,49.8 44.4,49.8 v1(48.8,45.4) 49.1,45.1 59.9,45.1 v1(60.8,44.2)
NetDS1_1: DS1.1 R5.1 | length 1.3
  Top Layer w0.178: DS1.1 4.35,48.35 5.575,48.35 R5.1
NetP1_2: P1.2 R3.1 U1.7 | length 11.7
  Top Layer w0.178: R3.1 32.086,38.039 32.086,35.984 P1.2 ; v1(32.3,43.1) 32.33,43.13 U1.7
  Bottom Layer w0.178: P1.2 32.285,35.815 32.285,43.085 v1(32.3,43.1)
NetR1_1: R1.1 RPI1.27 U1.5 | length 29.3
  Top Layer w0.178: v1(30.375,40.495) 30.422,40.543 33.752,40.543 U1.5 ; v1(31.5,48) 31.9,47.6 42,47.6 45.39,50.99 RPI1.27 ; U1.5@33.85,40.595 35.87,40.595 R1.1
  Bottom Layer w0.178: v1(30.375,40.495) 31.5,41.62 v1(31.5,48)
NetR2_1: R2.1 RPI1.28 U1.6 | length 32
  Top Layer w0.178: v1(29.9,48.1) 30.6,48.8 31.9,48.8 32.6,48.1 41.7,48.1 43,49.4 44.3,50.7 44.3,52.68 45.3,53.68 45.3,53.7 45.37,53.77 RPI1.28 ; v1(30.275,41.895) 30.292,41.877 33.783,41.877 U1.6 ; U1.6@33.85,41.87 34.355,41.87 34.799,42.314 35.639,42.314 R2.1
  Bottom Layer w0.178: v1(29.9,48.1) 29.9,42.321 30.275,41.946 v1(30.275,41.895)
NetRPI1_7: RPI1.7
NetRPI1_8: RPI1.8
NetRPI1_10: RPI1.10
NetRPI1_11: RPI1.11
NetRPI1_12: RPI1.12
NetRPI1_13: RPI1.13
NetRPI1_15: RPI1.15
NetRPI1_16: RPI1.16
NetRPI1_18: RPI1.18
NetRPI1_19: RPI1.19
NetRPI1_21: RPI1.21
NetRPI1_22: RPI1.22
NetRPI1_23: RPI1.23
NetRPI1_24: RPI1.24
NetRPI1_26: RPI1.26
NetRPI1_29: RPI1.29
NetRPI1_31: RPI1.31
NetRPI1_32: RPI1.32
NetRPI1_33: RPI1.33
NetRPI1_35: RPI1.35
NetRPI1_36: RPI1.36
NetRPI1_37: RPI1.37
NetRPI1_38: RPI1.38
NetRPI1_40: RPI1.40
PG: pad.2@16.1,42.9 R4.1 U2.4 | length 5.5
  Top Layer w0.203: R4.1 15.1,44.865 18.62,41.345 19.027,41.345 19.05,41.321 U2.4
SS/TR: C6.2 U2.9 | length 2.1
  Top Layer w0.203: C6.2 17.025,38.515 U2.9
SW: L1.1 U2.1 U2.2 U2.3
VIN: C2.1 C3.2 C5.1 P2.2 U2.10 U2.11 U2.12 U2.13 | length 6.4
  Top Layer w0.203: C5.1 18.275,37.065 18.912,37.702 19.188,37.702 19.55,38.065 U2.10 ; C3.2 21.345,36.26 21.345,37.47 21.8,37.925 21.8,38.9 21.535,39.165 U2.13
pads on no net: J1.MH1 J1.MH2 MP1.1 MP2.1 MP3.1 MP4.1 U2.17@19.8,39.915 U3.22 U4.22

## Polygon pours and split planes (outlines as drawn)
GND on Top Layer "GND_L01_P072" (solid, pour order 72): 20.9,40.015 22,40.015 22.3,39.715 24.8,39.715 25,39.915 25,41.215 24.7,41.515 21.685,41.515 20.9,40.73
VIN on Top Layer "VIN_L01_P050" (solid, pour order 50): 3.255,42.3 2.4,41.549 2.4,39.5 2.808,39.092 7.181,39.002 7.7,38.511 7.7,34.415 7.7,32.7 8.185,32.215 16.8,32.215 19.4,32.215 21.6,34.415 21.6,37.215 21.09,37.725 21.09,38.425 20.7,38.815 19.8,38.815 19.8,37.915 19.3,37.415 19.3,36.615 18.9,36.215 18.6,36.215 18.5,36.315 18.5,36.815 18.125,36.815 18.125,36.34 17.6,35.815 14.6,35.815 14.1,36.315 8.115,42.3
SW on Top Layer "SW_L01_P066" (solid, pour order 66): 19.3,41.015 19.3,42.815 18.8,43.315 17.404,43.594 17.35,45.065 17.6,45.315 21.3,45.315 21.65,44.965 21.65,43.365 20.7,42.415 20.7,41.015
GND on Top Layer "GND_L01_P048" (solid, pour order 48): 17.8,39.165 17.75,39.215 16.25,39.215 16.2,39.265 16.2,41.315 16.3,41.415 18.2,41.415 18.6,41.015 18.6,39.215 18.55,39.165
GND on Top Layer "GND_L01_P088" (solid, pour order 88): 5.2,46.2 6.046,46.877 11.523,46.877 12,46.4 12,43.5 11.333,43 5.5,43 2.5,43 2.3,43.2 2.3,45.967 2.65,46.2
+5 on Top Layer "Top Layer-+5" (solid, pour order 78): 16.8,46.115 16.45,46.465 16.5,49.015 16.8,49.315 18.5,49.315 21.9,49.315 24.3,46.915 24.3,42.315 23.8,41.815 22.3,41.815 22.1,42.015 22.1,45.515 21.6,46.015
SW on Top Layer "SW_L01_P064" (solid, pour order 64): 23.3,39.5
GND on Top Layer "GND_L01_P049" (solid, pour order 49): 15.5,37.865 17.55,37.865 17.6,37.815 17.6,36.265 15.4,36.265 15.4,37.765
no net on Top Layer "NONET_L04_P-001" (solid, pour order 59): 14.9,43.75
no net on Top Layer "NONET_L01_P053" (solid, pour order 53): 55.4,28.5
no net on Top Layer "NONET_L01_P058" (solid, pour order 58): 57.9,28.3
no net on Top Layer "NONET_L01_P056" (solid, pour order 56): 4.325,39.562
no net on Top Layer "NONET_L01_P054" (solid, pour order 54): 16.4,37.8
no net on Top Layer "NONET_L01_P052" (solid, pour order 52): 13.2,35.8
no net on Top Layer "NONET_L01_P061" (solid, pour order 61): 12.8,34.8
no net on Top Layer "NONET_L01_P060" (solid, pour order 60): 3.95,39.525
GND on Int1 (GND) (split plane): 3.5,55.49 65.5,55.49 65.516,55.491 65.735,55.483 65.968,55.455 66.199,55.409 66.425,55.345 66.645,55.264 66.858,55.166 67.063,55.051 67.259,54.92 67.443,54.775 67.616,54.616 67.775,54.443 67.92,54.259 68.051,54.063 68.166,53.858 68.264,53.645 68.345,53.425 68.409,53.199 68.455,52.968 68.483,52.735 68.491,52.516 68.49,52.5 68.49,3.5 68.491,3.484 68.483,3.265 68.455,3.032 68.409,2.802 68.345,2.575 68.264,2.355 68.166,2.142 68.051,1.937 67.92,1.741 67.775,1.557 67.615,1.385 67.443,1.225 67.259,1.08 67.063,0.949 66.858,0.834 66.645,0.736 66.425,0.655 66.198,0.591 65.968,0.545 65.735,0.517 65.516,0.509 65.5,0.51 3.5,0.51 3.484,0.509 3.265,0.517 3.032,0.545 2.802,0.591 2.575,0.655 2.355,0.736 2.142,0.834 1.937,0.949 1.741,1.08 1.557,1.225 1.385,1.385 1.225,1.557 1.08,1.741 0.949,1.937 0.834,2.142 0.736,2.355 0.655,2.575 0.591,2.802 0.545,3.032 0.517,3.265 0.509,3.484 0.51,3.5 0.51,52.5 0.509,52.516 0.517,52.735 0.545,52.968 0.591,53.198 0.655,53.425 0.736,53.645 0.834,53.858 0.949,54.063 1.08,54.259 1.225,54.443 1.385,54.615 1.557,54.775 1.741,54.92 1.937,55.051 2.142,55.166 2.355,55.264 2.575,55.345 2.802,55.409 3.032,55.455 3.265,55.483 3.484,55.491
+5 on Int2 (PWR) (split plane): 3.5,55.49 25.923,55.49 25.923,38.862 25.923,38.86 25.923,38.857 25.927,38.823 25.93,38.789 25.931,38.786 25.931,38.784 25.942,38.751 25.952,38.718 25.953,38.716 25.954,38.713 25.97,38.683 25.987,38.653 25.988,38.651 25.989,38.649 26.012,38.622 26.034,38.596 26.035,38.594 26.037,38.592 26.064,38.571 26.091,38.549 26.093,38.548 26.095,38.546 26.125,38.53 26.156,38.514 26.158,38.513 26.16,38.512 26.193,38.503 26.227,38.492 26.229,38.492 26.231,38.492 26.266,38.489 26.3,38.485 26.302,38.485 26.305,38.485 27.023,38.494 27.023,33.1 27.023,29.5 27.023,28.127 27.023,28.126 27.023,28.125 27.027,28.089 27.03,28.053 27.031,28.053 27.031,28.052 27.041,28.017 27.052,27.983 27.052,27.982 27.053,27.981 27.07,27.95 27.087,27.918 27.087,27.917 27.088,27.916 27.111,27.888 27.134,27.86 27.135,27.859 27.163,27.837 27.191,27.814 27.191,27.813 27.192,27.813 27.224,27.796 27.256,27.779 27.257,27.779 27.257,27.778 27.292,27.768 27.326,27.757 27.327,27.757 27.328,27.757 27.364,27.754 27.4,27.75 27.401,27.75 27.402,27.75 68.49,27.948 68.49,3.5 68.491,3.484 68.483,3.265 68.455,3.032 68.409,2.802 68.345,2.575 68.264,2.355 68.166,2.142 68.051,1.937 67.92,1.741 67.775,1.557 67.615,1.385 67.443,1.225 67.259,1.08 67.063,0.949 66.858,0.834 66.645,0.736 66.425,0.655 66.198,0.591 65.968,0.545 65.735,0.517 65.516,0.509 65.5,0.51 3.5,0.51 3.484,0.509 3.265,0.517 3.032,0.545 2.802,0.591 2.575,0.655 2.355,0.736 2.142,0.834 1.937,0.949 1.741,1.08 1.557,1.225 1.385,1.385 1.225,1.557 1.08,1.741 0.949,1.937 0.834,2.142 0.736,2.355 0.655,2.575 0.591,2.802 0.545,3.032 0.517,3.265 0.509,3.484 0.51,3.5 0.51,52.5 0.509,52.516 0.517,52.735 0.545,52.968 0.591,53.198 0.655,53.425 0.736,53.645 0.834,53.858 0.949,54.063 1.08,54.259 1.225,54.443 1.385,54.615 1.557,54.775 1.741,54.92 1.937,55.051 2.142,55.166 2.355,55.264 2.575,55.345 2.802,55.409 3.032,55.455 3.265,55.483 3.484,55.491